# Altium PCB DCR.PcbDoc
Units mil, origin at the board's own origin, x right, y up, seen from the top; angles counter-clockwise.
Board outline 4535 x 2005 mil, 2 copper layers (Top Layer, Bottom Layer); 6 components, 13 nets, 80 pads, 2 vias.
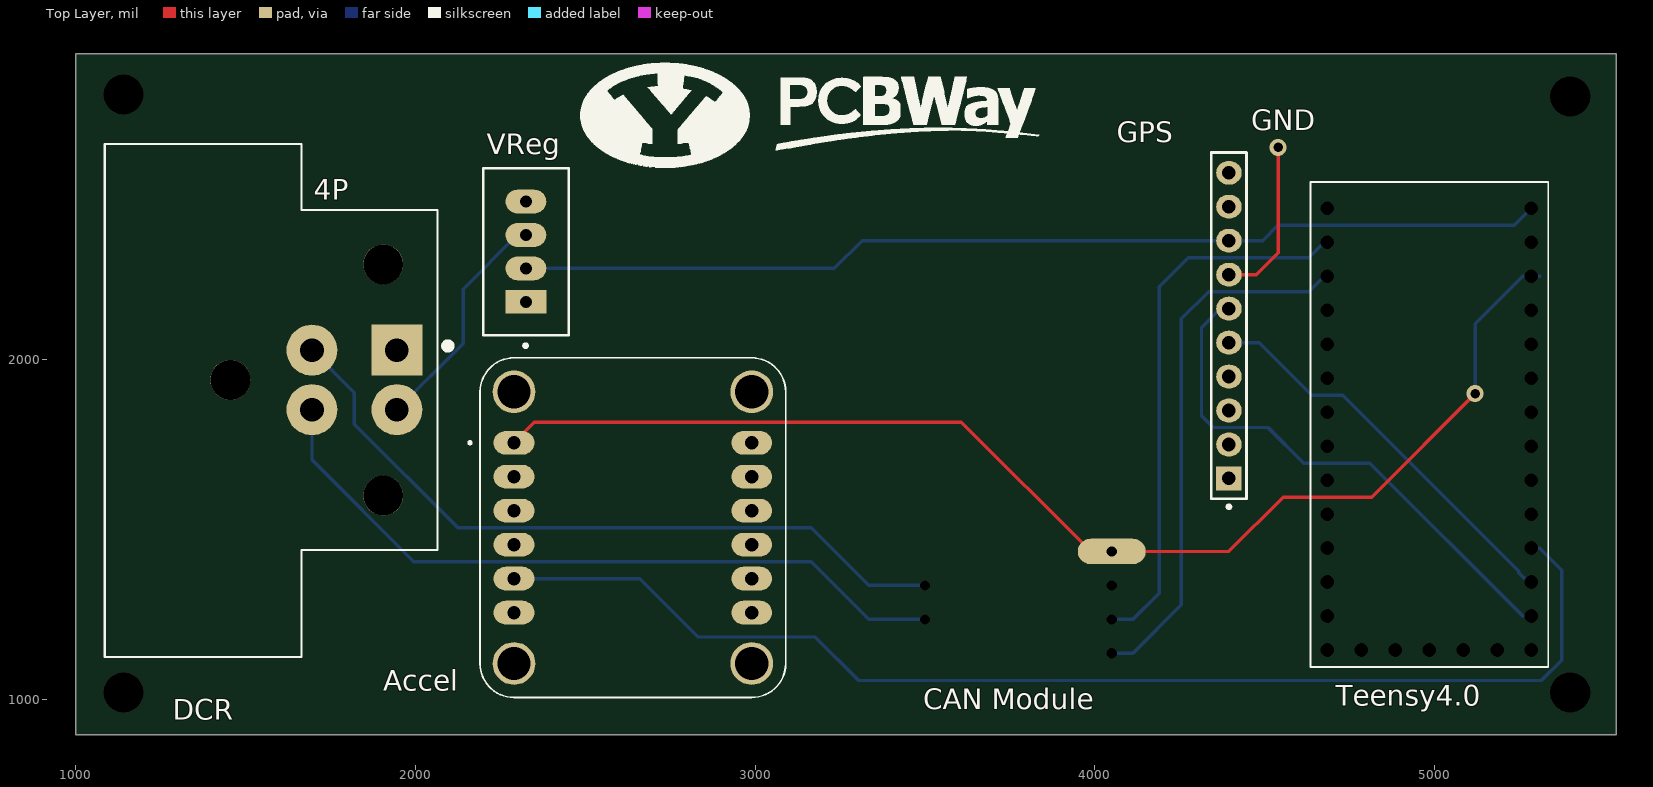
[diagram p0: Top Layer view]
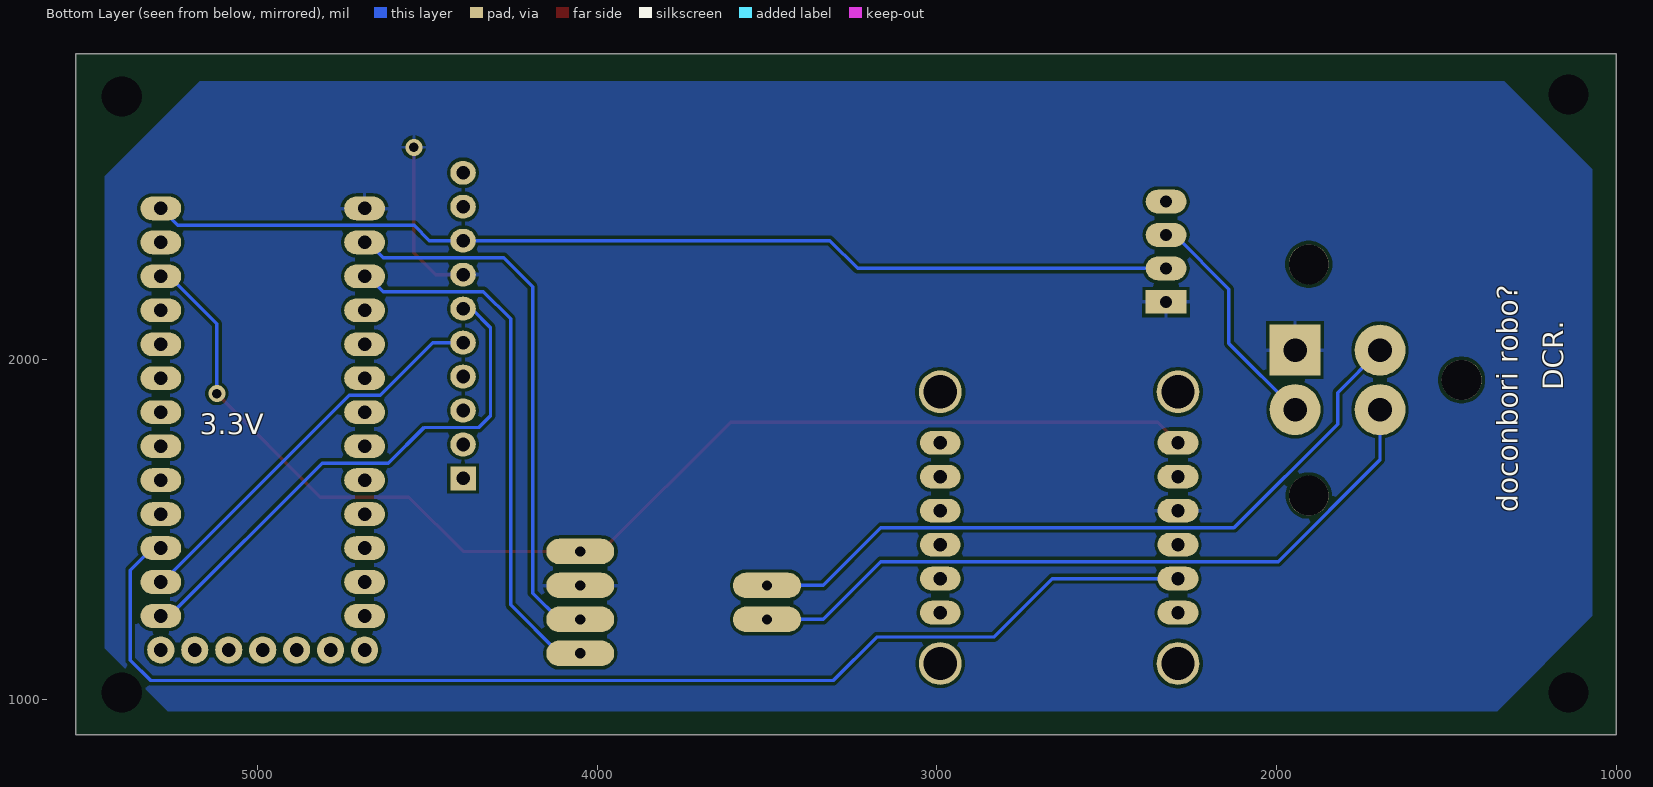
[diagram p1: Bottom Layer view, seen from below]

## Layer stack, top to bottom
Top Solder: solder mask 0.4, Solder Resist, Dk 3.5
Top Layer: signal copper 1.4
Dielectric 1: dielectric 12.6, FR-4, Dk 4.8
Bottom Layer: signal copper 1.4
Bottom Solder: solder mask 0.4, Solder Resist, Dk 3.5

## Board outline
1000,895 5535,895 5535,2900 1000,2900

## Design rules (kind name [scope] priority, off if disabled: settings)
Clearance [All] p1: gap=10 ignorepadtopadclearanceinfootprint=FALSE
HoleSize [All] p1: absolutevalues=TRUE maxlimit=200 minlimit=1 maxpercent=80.000 minpercent=20.000
PolygonConnect [All] p1: connectstyle=Relief reliefconductorwidth=10 reliefentries=4 polygonreliefangle="90 Angle" airgapwidth=10
RoutingVias [All] p1: holewidth=28 width=50 viastyle="Through Hole" minholewidth=28 minwidth=50 maxholewidth=28 maxwidth=50
SolderMaskExpansion [All] p1: expansion=4 istentingtop=FALSE
SupplyNets "Schematic Supply Nets" [InNet('GND')] p1: voltage=0.000
Width [All] p1: maxlimit=10 minlimit=10 preferedwidth=10
29 further rules are at their usual default settings.

## Components (designator, comment, footprint, x,y, rotation, side; value= is the part's Value field where it differs from the comment)
4P "DT13-4P" TE_DT13-4P 1695.16,1940 r0 top
Accel "4754" MODULE_4754 2640,1505 r270 top
"CAN Module" "CAN Module" "CAN Module-Footprint-1" 4050,1435 r180 top
GPS "M20-9771046" FP-M20-9771046-MFG 4395,2100 r90 top
Teensy4.0 "DEV-15583" MODULE_DEV-15583 4985,1795 r0 top
VReg "B04B-XASK-1(LF)(SN)" FP-B04B-XASK-1_LF_SN-MFG 2325,2317.64 r270 top

## Footprints (in the part's own frame and the unit in brackets; to place one, negate y for a bottom-side part, rotate by r counter-clockwise, add the part's x,y. Pads: shape width x height; smd on the part's side, far side on the other; paste and mask are expansions set on the pad)
"CAN Module-Footprint-1" [mil]
  round 0 / inner round 60 / far side oval 200x75 hole 30: 1(0,300) 2(0,200) 3(0,100) 5(550,200) 6(550,100)
  oval 200x75 / inner round 60 / far side oval 200x75 hole 30: 4(0,0)
FP-B04B-XASK-1_LF_SN-MFG [mil]
  rect 70x120 hole 35.43 paste-99999 mask+0: 1(147.64,0)
  oval 70x120 hole 35.43 paste-99999 mask+0: 2(49.21,0) 3(-49.21,0) 4(-147.64,0)
  silkscreen extent -246,-126 281,126, body extent -250,-130 250,130, height 10
FP-M20-9771046-MFG [mil]
  rect 70x75 hole 40.16 paste-99999 mask+0: 1(-450,0)
  oval 70x75 hole 40.16 paste-99999 mask+0: 2(-350,0) 3(-250,0) 4(-150,0) 5(-50,0) 6(50,0) 7(150,0) 8(250,0) 9(350,0) 10(450,0)
  silkscreen extent -538,-52 510,52, body extent -514,-56 514,56, height 10
MODULE_4754 [mil]
  oval 70x120 hole 39.37: JP1_1(-250,-350) JP1_2(-150,-350) JP1_3(-50,-350) JP1_4(50,-350) JP1_5(150,-350) JP1_6(250,-350) JP2_1(-250,350) JP2_2(-150,350) JP2_3(-50,350) JP2_4(50,350) JP2_5(150,350) JP2_6(250,350)
  round 125.98 hole 98.43: P1(-400,350) P2(400,350) P3(-400,-350) P4(400,-350)
  silkscreen extent -500,-483 500,450
MODULE_DEV-15583 [mm]
  round 0 / inner oval 3.048x1.778 / far side oval 3.048x1.778 hole 1.02: 0(-7.62,13.97) 1(-7.62,11.43) 2(-7.62,8.89) 3(-7.62,6.35) 3.3V_2(7.62,11.43) 4(-7.62,3.81) 5(-7.62,1.27) 6(-7.62,-1.27) 7(-7.62,-3.81) 8(-7.62,-6.35) 9(-7.62,-8.89) 10(-7.62,-11.43) 11(-7.62,-13.97) 14(7.62,-13.97) 15(7.62,-11.43) 16(7.62,-8.89) 17(7.62,-6.35) 18(7.62,-3.81) 19(7.62,-1.27) 20(7.62,1.27) 21(7.62,3.81) 22(7.62,6.35) 23(7.62,8.89) G1(-7.62,16.51) G3(7.62,13.97) VIN(7.62,16.51)
  round 0 / inner round 2.032 / far side round 2.032 hole 1.02: 3.3V_1(-2.54,-16.51) 12(-7.62,-16.51) 13(7.62,-16.51) G2(0,-16.51) ON-OFF(5.08,-16.51) PGM(2.54,-16.51) VBAT(-5.08,-16.51)
  silkscreen extent -8.89,-17.78 8.89,18.48
TE_DT13-4P [mm]
  rect 3.81x3.81 hole 1.76: 1(6.35,2.225)
  round 3.81 hole 1.76: 2(6.35,-2.225) 3(0,-2.225) 4(0,2.225)
  round 2.99 hole 2.99 unplated: ""(-6.1,0) ""(5.33,-8.65) ""(5.33,8.65)
  silkscreen extent -15.5,-20.71 10.41,17.64

## Part data
4P: "DT13 Series, 4.44mm Pitch 4 Way 2 Row Right Angle PCB Header, Solder Termination", Package=None, Availability=Unavailable, MF="TE Connectivity", MP=DT13-4P, Price=None, SnapEDA_Link=https://www.snapeda.com/parts/DT13-4P/TE%20Connectivity%20Deutsch%20Connectors/view-part/2708791/?ref=snap, TE_purchase_URL=https://www.te.com/usa-en/product-DT13-4P.html?te_bu=Cor&te_type=disp&te_campaign=seda_glo_cor-seda-global-disp-prtnr-fy19-seda-model-bom-cta_sma-317_1&elqCampaignId=32493
Accel: "Adafruit 9-DOF Orientation IMU Fusion Breakout - BNO085 (BNO080) - STEMMA QT / Qwiic", Package=None, Availability="In Stock", Check_prices=https://www.snapeda.com/parts/4754/Adafruit+Industries/view-part/?ref=eda, MF=Adafruit, MP=4754, Price=None, Purchase-URL=https://pricing.snapeda.com/search/part/4754/?ref=eda, SnapEDA_Link=https://www.snapeda.com/parts/4754/Adafruit+Industries/view-part/?ref=snap
"CAN Module": library part CMP-00030-00003-1, "CAN waveshare"
GPS: library part CMP-15831-000029-1, "CONN HEADER VERT 10POS 2.54MM", Case/Package=SIL, Color=Black, Current Rating=3A, Package Quantity=500, Voltage Rating=750V, Connector Type="Male Pin", Contact Material=Brass, Contact Mating Length=0.228inch, Contact Plating=Tin, Contact Type="Male Pin", Gender=Male, Housing Material=Nylon, Mount="Through Hole", Number of Contacts=10, Number of Positions=10, Number of Rows=1, Packaging=Bulk, Pitch=2.54mm, Radiation Hardening=No, Series=M20, Termination=Solder
Teensy4.0: "RT1062 Teensy 4.0 i.MX ARMÂ® CortexÂ®-M7 MPU Embedded Evaluation Board", Package=None, Digi-Key_Part_Number=1568-DEV-15583-ND, Digi-Key_Purchase_URL=https://www.digikey.com/product-detail/en/sparkfun-electronics/DEV-15583/1568-DEV-15583-ND/10384551?utm_source=snapeda&utm_medium=aggregator&utm_campaign=symbol, MF="SparkFun Electronics", MP=DEV-15583, SnapEDA_Link=https://www.snapeda.com/parts/DEV-15583/SparkFun%20Electronics/view-part/4001229/?ref=snap
VReg: library part CMP-17439-000018-1, "CONN HEADER VERT 4POS 2.5MM", Current Rating=3A, Manufacturer=JST, Temperature="-25°C to +85°C", Temperature Range High=+85°C, Temperature Range Low=-25°C, Voltage Rating=250V, Automotive=No, Category=Conn, ComponentLink2Description=Datasheet, ComponentLink2URL=http://www.jst-mfg.com/product/pdf/eng/eXA1.pdf, Conn Gender=Male, Conn Orientation=Straight, Contact Material=Tin,Copper, Device Class L1=Connectors, Device Class L2="Headers and Wire Housings", Device Class L3=unset, Digikey Description="CONN HEADER VERT 4POS 2.5MM", Height=8.8mm, Lead Free=Yes, Manufacturer Part Number=B04B-XASK-1(LF)(SN), Number of Contacts=4, Number of Rows=1, Octopart=https://octopart.com/b04b-xask-1%28lf%29%28sn%29-jst-3990149, Package=B04B-XASK-1(LF)(SN), Pitch=2.5mm, RoHS=TRUE

## Free pads (board coordinates)
  round 60 hole 118.11: 9(1140,1020) 9(1140,2780) 9(5400,1020) 9(5400,2775)

## Via types
v1: diameter 50, hole 28, Top Layer to Bottom Layer, 2 vias

## Nets (pads, with @x,y where several pads share a name; then routed paths per layer and width w, separated by ;. In a path a pad name is that pad's centre, name@x,y a point inside that pad or via, vN(x,y) a via of type N, cw(c..) or ccw(c..) an arc to the next point about the centre after c; other vN are vias at no path point)
3.3V: "CAN Module.4" Accel.JP1_1 Teensy4.0.3.3V_2 | length 3682.9
  Top Layer w10: Accel.JP1_1 2350,1815 3607.5,1815 3987.5,1435 4050,1435 4395,1435 4555,1595 4815,1595 v1(5120,1900)
  Bottom Layer w10: Accel.JP1_1 Accel.JP1_1@2315,1755 ; v1(5120,1900) 5120,2105 5260,2245 Teensy4.0.3.3V_2 Teensy4.0.3.3V_2@5310,2245
5V: GPS.8 Teensy4.0.VIN VReg.2 | length 3033.1
  Bottom Layer w10: VReg.2 3233.43,2268.43 3315,2350 GPS.8 4494.29,2350 4539.29,2395 5235,2395 Teensy4.0.VIN
12V: 4P.2 VReg.3 | length 686.4
  Bottom Layer w10: 4P.2 2140,2047.24 2140,2206.85 2300,2366.85 VReg.3
CANH: 4P.3 "CAN Module.5" | length 2147
  Bottom Layer w10: 4P.3 1695.16,1704.84 1995,1405 3165,1405 3335,1235 3500,1235
CANL: 4P.4 "CAN Module.6" | length 2146.1
  Bottom Layer w10: 4P.4 1820,1902.76 1820,1810 2125,1505 3165,1505 3335,1335 3500,1335
CANRX: "CAN Module.2" Teensy4.0.0 | length 1623.4
  Bottom Layer w10: 4050,1235 4112.5,1235 4190,1312.5 4190,2215 4275,2300 4630,2300 4675,2345 Teensy4.0.0
CANTX: "CAN Module.1" Teensy4.0.1 | length 1588.3
  Bottom Layer w10: 4050,1135 4112.5,1135 4255,1277.5 4255,2120 4335,2200 4630,2200 4675,2245 Teensy4.0.1
GND: 4P.1 "CAN Module.3" Accel.JP1_3 GPS.7 Teensy4.0.G1 VReg.1 | length 481.9
  Top Layer w10: GPS.7 4475,2250 4540,2315 v1(4540,2625)
P0: Accel.JP2_2
RX: GPS.6 Teensy4.0.14 | length 1578.2
  Bottom Layer w10: GPS.6 4370,2150 4314.27,2094.27 4314.27,1835.02 4349.29,1800 4510,1800 4615,1695 4810,1695 5260,1245 Teensy4.0.14
RX2: Teensy4.0.7
SDA: Accel.JP1_5 Teensy4.0.16 | length 3616
  Bottom Layer w10: Accel.JP1_5 2660,1355 2832.01,1182.99 3177.01,1182.99 3305,1055 5315,1055 5375,1115 5375,1380 5310,1445 Teensy4.0.16
TX: GPS.5 Teensy4.0.15 | length 1184.6
  Bottom Layer w10: GPS.5 4484.29,2050 4639.29,1895 4730.71,1895 5248.52,1377.19 5248.52,1372.72 5276.24,1345 Teensy4.0.15
pads on no net: 4P. Accel.JP1_2 Accel.JP1_4 Accel.JP1_6 Accel.JP2_1 Accel.JP2_3 Accel.JP2_4 Accel.JP2_5 Accel.JP2_6 Accel.P1 Accel.P2 Accel.P3 Accel.P4 GPS.1 GPS.2 GPS.3 GPS.4 GPS.9 GPS.10 Teensy4.0.2 Teensy4.0.3 Teensy4.0.3.3V_1 Teensy4.0.4 Teensy4.0.5 Teensy4.0.6 Teensy4.0.8 Teensy4.0.9 Teensy4.0.10 Teensy4.0.11 Teensy4.0.12 Teensy4.0.13 Teensy4.0.17 Teensy4.0.18 Teensy4.0.19 Teensy4.0.20 Teensy4.0.21 Teensy4.0.22 Teensy4.0.23 Teensy4.0.G2 Teensy4.0.G3 Teensy4.0.ON-OFF Teensy4.0.PGM Teensy4.0.VBAT VReg.4

## Polygon pours and split planes (outlines as drawn)
GND on Bottom Layer "GND_L02_P000" (solid, pour order 0): 1070,2560 1330,2820 5170,2820 5450,2540 5450,1150 5265,965 1350,965 1070,1245

## Silkscreen, mask and mechanical layers (free items; w line width, h text height)
Top Overlay:
  drawing of 7 lines, arcs and shapes, not listed
  text "GND" at 4460,2675 h60
  text "DCR" at 1285,940 h60
Bottom Overlay:
  text "DCR." at 1155,1910 h60 r270
  text "3.3V" at 5170,1780 h60
  text "doconbori robo?" at 1290,1550 h60 r270